# EAGLE board Slotblech-V01 (EAGLE 6.3)
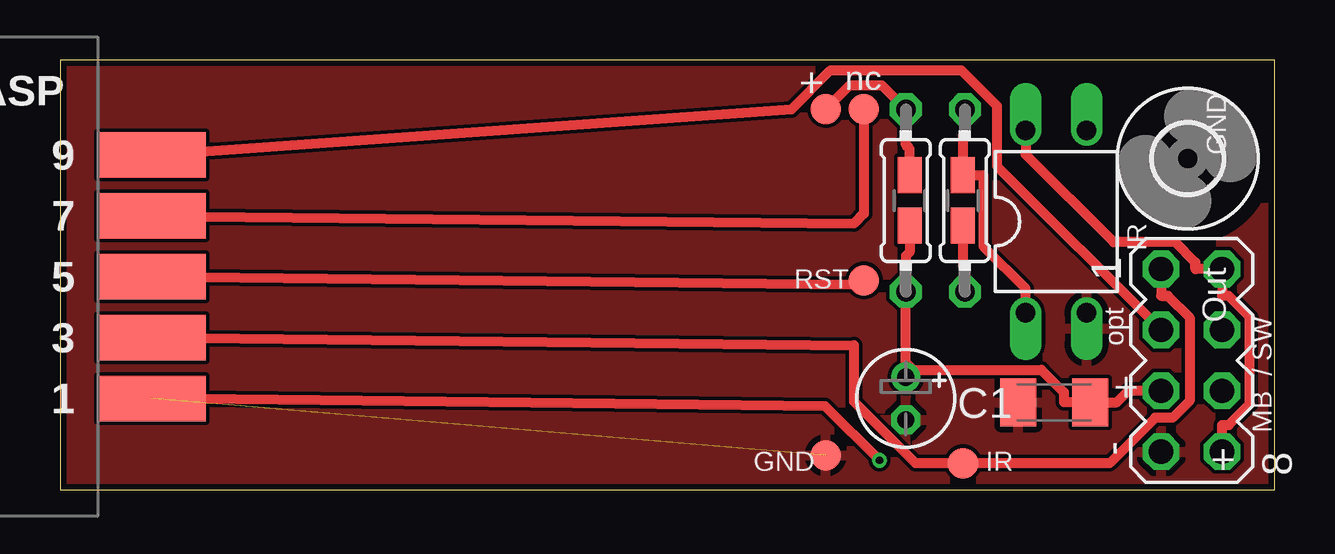
[diagram p0: board, top side]
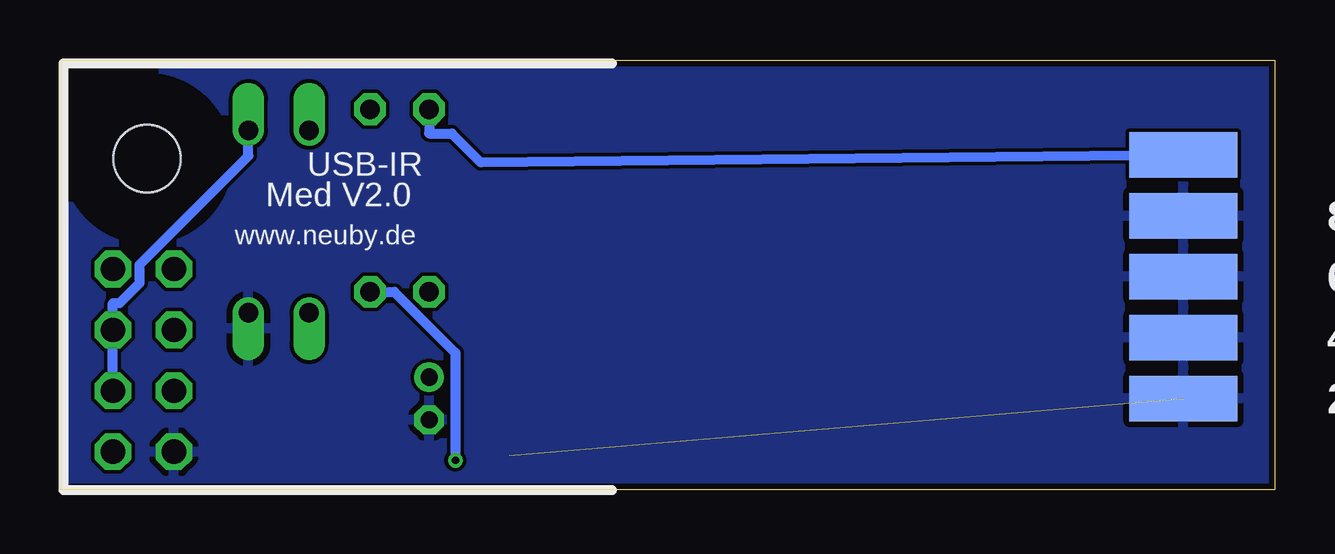
[diagram p1: board, bottom side, seen from below]

Size 50.62 x 17.93 mm. Coordinates in mm from the lower left corner, seen from the top.
Outline: 0,0 50.62,0 50.62,17.93 0,17.93 0,0
Copper layers (1*16): Top 0.035mm / dielectric 1.5mm / Bottom 0.035mm
Design rules "Fusion_eagle_rule_v1.1": minimum track width 6mil, minimum drill 12mil, track to track 6mil, track to pad 6mil, pad to pad 6mil, via to via 6mil, smd to smd 0mil, copper to edge 10mil, drill to drill 10mil, minimum pad ring 10mil, minimum via ring 6mil, stop-mask expansion 2mil, vias tented up to drill 100mil, thermal gap 10mil
Net classes: 0 default: width 0.406 mm

## Footprints (pad centres in the part's own frame; a part is rotated, then mirrored left to right if it is on the bottom)
CON2X5EDGE = smd 4.5 x 1.9: P$1 0,5.08; P$3 0,2.54; P$5 0,0; P$7 0,-2.54; P$9 0,-5.08 | smd 4.5 x 1.9 bottom: P$2 0,5.08; P$4 0,2.54; P$6 0,0; P$8 0,-2.54; P$10 0,-5.08
E1,8-4 = drill 0.711 pad 1.168: + -0.889,0 | drill 0.711 pad 1.168 octagon: - 0.889,0
C1206K = smd 1.5 x 2: 1 -1.5,0; 2 1.5,0
2,8 = hole 2.8: 0,0
DIL04 = drill 0.813 offset: 1 -1.27,-3.81; 2 1.27,-3.81; 3 1.27,3.81; 4 -1.27,3.81
0204/7 = drill 0.813 octagon: 1 -3.81,0; 2 3.81,0
R0805W = smd 1.5 x 1: 1 -1.052,0; 2 1.052,0
MA04-2 = drill 1.016 octagon: 1 -3.81,-1.27; 2 -3.81,1.27; 3 -1.27,-1.27; 4 -1.27,1.27; 5 1.27,-1.27; 6 1.27,1.27; 7 3.81,-1.27; 8 3.81,1.27
B1,27 = smd 1.27 x 1.27: TP 0,0

## Placement (x,y rotation side)
2USB-ASP  CON2X5EDGE  [CON2X5EDGE]  3.81,8.89 180 top
C1  4,7uF  [E1,8-4]  35.24,3.81 270 top
C2  4,7uF  [C1206K]  41.43,3.65 180 top
H1  MOUNT-HOLE2.8  [2,8]  46.99,13.81 0 top
OK2  PC817  [DIL04]  41.51,11.19 0 top
R1  100  [0204/7]  37.7,12.06 90 top
R2  560  [0204/7]  35.24,12.06 90 top
R3  560  [R0805W]  35.4,12.06 90 top
R4  100  [R0805W]  37.62,12.06 90 top
SV2  [MA04-2]  47.15,5.4 270 top
TP1  TPB1,27  [B1,27]  31.91,15.88 0 top
TP2  TPB1,27  [B1,27]  31.91,1.43 0 top
TP3  TPB1,27  [B1,27]  33.5,15.88 0 top
TP4  TPB1,27  [B1,27]  33.5,8.73 0 top
TP5  TPB1,27  [B1,27]  37.62,1.11 0 top

## Library data of the parts
2USB-ASP = schwen
C1 C2 R1-R4 = rcl
H1 = holes
OK2 = optocoupler; MPN: PC817X4J000F; OC_FARNELL: 9707727; OC_NEWARK: 97K7059
SV2 = con-lstb; OC_FARNELL: unknown; OC_NEWARK: unknown
TP1-TP5 = testpad

## Nets
GND: 2USB-ASP.P$2 2USB-ASP.P$4 2USB-ASP.P$6 2USB-ASP.P$8 C1.- C2.2 OK2.2 SV2.7 TP2.TP
MISO: 2USB-ASP.P$1 R1.1 R4.1
MOSI: 2USB-ASP.P$9 SV2.3
N$1: C1.+ C2.1 R2.1 R3.1 SV2.5
N$2: OK2.1 R1.2 R4.2
NC: 2USB-ASP.P$7 TP3.TP
OK1: OK2.3 SV2.4 SV2.6
OK2: OK2.4 SV2.2 SV2.8
RST: 2USB-ASP.P$5 TP4.TP
SCK: 2USB-ASP.P$3 SV2.1 TP5.TP
VCC: 2USB-ASP.P$10 R2.2 R3.2 TP1.TP

## Tracks (layer width: path | path; a pad name or v marks a point on that pad's centre or on a via)
GND  (1 unrouted)
  pour Bottom: 0,18.1 0,0 50.48,0 50.48,17.78
  pour Top: 0.32,18.1 50.48,17.78 50.48,0 0,0
MISO  (via drill 0.3 pad 0.61)
  Top 0.406: v34.15,1.23 31.89,3.49 2USB-ASP.P$1 | R1.1 37.7,9.27 37.62,9.35 R4.1
  Bottom 0.406: R1.1 36.69,8.26 34.15,5.71 v34.15,1.23
MOSI
  Top 0.406: 2USB-ASP.P$9 30.48,15.87 32.1,17.49 37.56,17.49 39.04,16.01 39.04,13.51 SV2.3
N$1
  Top 0.406: 35.55,5.01 40.89,5.01 41.83,4.07 41.83,3.65 C2.1 44.04,3.65 44.52,4.13 SV2.5 | C1.+ 35.55,5.01 | 35.55,5.01 35.24,5.31 R2.1 35.24,9.75 35.4,9.91 R3.1
N$2
  Top 0.406: R1.2 37.7,14.86 37.62,14.78 R4.2 38.48,13.12 38.48,10.15 40.24,8.4 OK2.1
NC
  Top 0.406: 2USB-ASP.P$7 33.09,11.11 33.5,11.52 TP3.TP
OK1
  Bottom 0.406: OK2.3 42.78,13.92 47.3,9.39 47.3,8.62 48.14,7.79 48.42,7.79 SV2.4 SV2.6
OK2
  Top 0.406: SV2.8 48.42,2.71 48.7,2.71 49.58,3.58 49.58,7.21 48.69,8.09 48.42,8.09 SV2.2 47.3,9.21 47.3,9.49 46.46,10.33 43.9,10.33 40.24,13.98 OK2.4
RST
  Top 0.406: 2USB-ASP.P$5 33.09,8.57 33.25,8.73 TP4.TP
SCK
  Top 0.406: 2USB-ASP.P$3 33.09,6.03 33.09,3.67 35.65,1.11 TP5.TP 43.74,1.11 45.63,3.01 46.36,3.01 47.07,3.71 47.07,7.18 46.16,8.09 45.88,8.09 SV2.1
VCC
  Top 0.406: R3.2 35.4,14.22 35.24,14.38 R2.2 34.24,16.87 32.91,16.87 TP1.TP
  Bottom 0.406: R2.2 35.24,14.86 34.3,14.86 33.09,13.65 2USB-ASP.P$10

## Text on the board
bOrigins: + | + | IR | SW | GND | + | MB | GND
tNames: + | nc | GND | IR | RST | opt | Out | + | MB / SW | - | GND | IR | +
bNames: USB-IR | Med V2.0 | www.neuby.de
bValues: 560R | 100R